# EAGLE board module_SX1278_type2 (EAGLE 9.0.1)
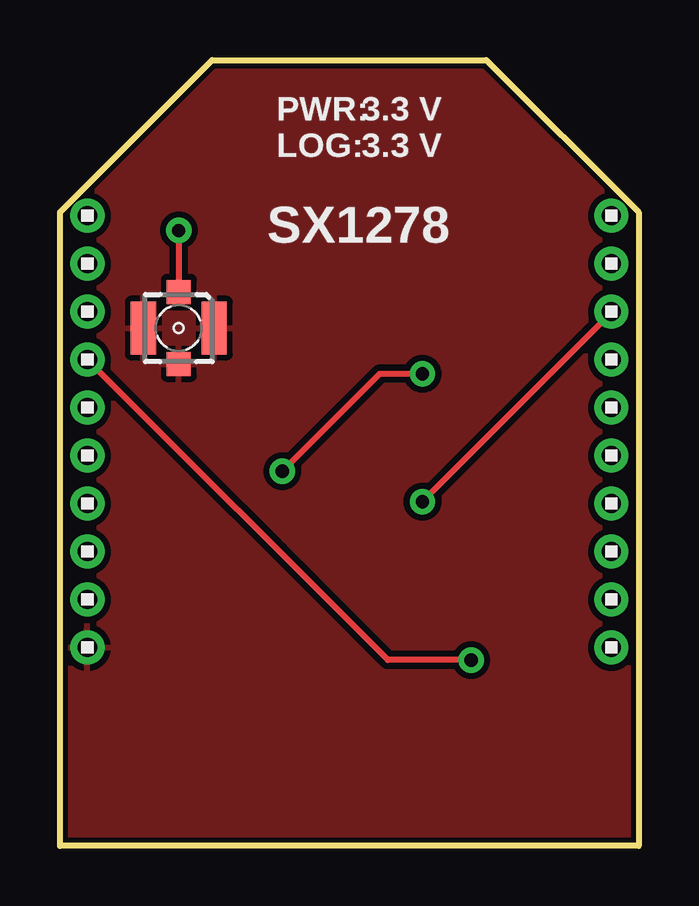
[diagram p0: board, top side]
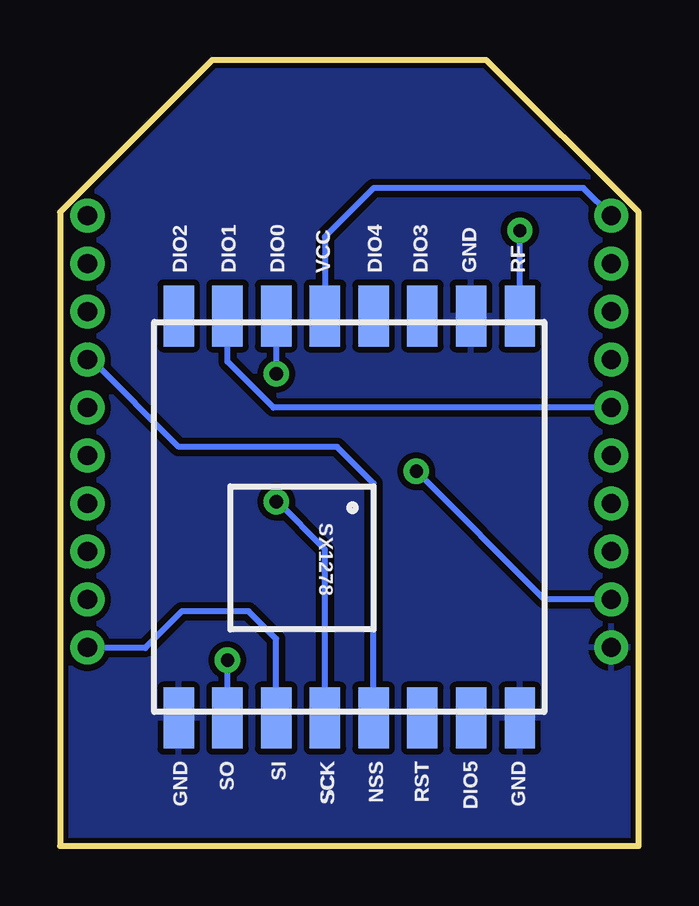
[diagram p1: board, bottom side, seen from below]

Size 24.13 x 32.77 mm. Coordinates in mm from the lower left corner, seen from the top.
Outline: 0,0 0,26.42 6.35,32.77 17.78,32.77 24.13,26.42 24.13,0 0,0
Copper layers (1*16): Top 0.035mm / dielectric 1.5mm / Bottom 0.035mm
Design rules "SparkFun-2-layer-STANDARD": minimum track width 10mil, minimum drill 20mil, track to track 10mil, track to pad 8mil, pad to pad 8mil, via to via 10mil, smd to smd 8mil, copper to edge 8mil, drill to drill 8mil, minimum pad ring 10mil, minimum via ring 10mil, stop-mask expansion 4mil, vias tented up to drill 25mil, thermal gap 10mil

## Footprints (pad centres in the part's own frame; a part is rotated, then mirrored left to right if it is on the bottom)
SMD1,27-2,54 = smd 1.27 x 2.54: 1 0,0
1X10 = drill 0.8 pad 1.422: 1 -9,0; 2 -7,0; 3 -5,0; 4 -3,0; 5 -1,0; 6 1,0; 7 3,0; 8 5,0; 9 7,0; 10 9,0
734120110 = smd 1 x 1: 1 0,-1.5; S@1 0,1.5 | smd 1.05 x 2.2: S@2 -1.475,0; S@3 1.475,0

## Placement (x,y rotation side)
DIO0  [SMD1,27-2,54]  15.11,22.1 180 bottom
DIO1  [SMD1,27-2,54]  17.14,22.1 180 bottom
DIO2  [SMD1,27-2,54]  19.18,22.1 180 bottom
DIO3  [SMD1,27-2,54]  9.02,22.1 0 bottom
DIO4  [SMD1,27-2,54]  11.05,22.1 180 bottom
DIO5  [SMD1,27-2,54]  6.99,5.33 0 bottom
GND  [SMD1,27-2,54]  6.99,22.1 0 bottom
GND2  [SMD1,27-2,54]  19.18,5.33 180 bottom
GND_ANT  [SMD1,27-2,54]  4.95,5.33 0 bottom
LEFT1  1X10  [1X10]  1.14,17.27 270 top
NSS  [SMD1,27-2,54]  11.05,5.33 180 bottom
RF  [SMD1,27-2,54]  4.95,22.1 0 bottom
RIGHT1  1X10  [1X10]  22.99,17.27 270 top
RST  [SMD1,27-2,54]  9.02,5.33 0 bottom
SCK  [SMD1,27-2,54]  13.08,5.33 180 bottom
SI  [SMD1,27-2,54]  15.11,5.33 180 bottom
SO  [SMD1,27-2,54]  17.14,5.33 0 bottom
VCC  [SMD1,27-2,54]  13.08,22.1 0 bottom
X1  734120110  [734120110]  4.95,21.59 180 top

## Library data of the parts
DIO0 DIO1-DIO5 GND GND2 GND_ANT NSS RF RST SCK SI SO VCC = wirepad
LEFT1 RIGHT1 = headers(2mm)
X1 = con-coax

## Nets
ANT: RF.1 X1.1
GND: GND2.1 GND.1 GND_ANT.1 LEFT1.10 X1.S@1 X1.S@2 X1.S@3
INT0: DIO0.1 LEFT1.9
INT1: DIO1.1 LEFT1.5
SCPI_SCK: RIGHT1.3 SCK.1
SPI_CS: NSS.1 RIGHT1.4
SPI_MISO: LEFT1.4 SO.1
SPI_MOSI: RIGHT1.10 SI.1
VCC: LEFT1.1 VCC.1

## Tracks (layer width: path | path; a pad name or v marks a point on that pad's centre or on a via)
ANT  (via drill 0.55)
  Top 0.254: v4.95,25.65 X1.1
  Bottom 0.254: RF.1 v4.95,25.65
GND
  pour Bottom: -0.51,-0.51 -0.51,26.67 6.1,33.27 18.03,33.27 24.64,26.67 24.64,-0.51
  pour Top: -0.25,-0.25 -0.25,26.54 6.22,33.02 17.91,33.02 24.38,26.54 24.38,-0.25
INT0  (via drill 0.55)
  Top 0.254: v9.27,15.62 13.33,19.69 v15.11,19.69
  Bottom 0.254: DIO0.1 v15.11,19.69 | LEFT1.9 3.92,10.27 v9.27,15.62
  Bottom 0.406: LEFT1.9 1.16,10.29
INT1
  Bottom 0.254: 1.16,18.29 LEFT1.5 15.22,18.27 17.14,20.19 DIO1.1
SCPI_SCK  (via drill 0.55)
  Top 0.254: v15.11,14.35 22.99,22.23 RIGHT1.3
  Bottom 0.254: SCK.1 13.08,12.37 15.07,14.35 v15.11,14.35
SPI_CS
  Bottom 0.254: NSS.1 11.05,15.11 12.57,16.64 19.18,16.64 22.81,20.27 RIGHT1.4
SPI_MISO  (via drill 0.55)
  Top 0.254: v17.14,7.75 13.67,7.75 LEFT1.4
  Bottom 0.254: SO.1 v17.14,7.75
SPI_MOSI
  Top 0.254: 22.97,8.25 RIGHT1.10
  Bottom 0.254: SI.1 15.11,8.64 16.26,9.78 19.05,9.78 20.57,8.25 22.97,8.25 RIGHT1.10
VCC
  Bottom 0.254: LEFT1.1 2.3,27.43 11.05,27.43 13.08,25.4 VCC.1

## Text on the board
_tNames: PWR: / LOG: | 3.3 V / 3.3 V | SX1278
_bNames: RF | GND | DIO3 | DIO4 | VCC | DIO0 | DIO1 | DIO2 | SX1278 | GND | DIO5 | RST | NSS | SCK | SI | SO | GND